# EAGLE board TMP (EAGLE 7.4.0)
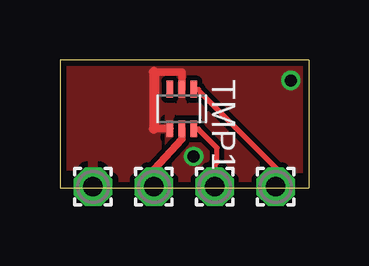
[diagram p0: board, top side]
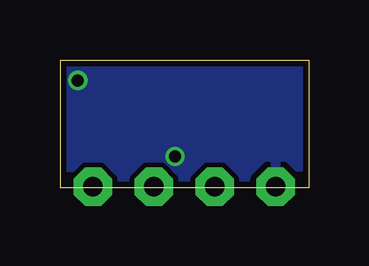
[diagram p1: board, bottom side, seen from below]

Size 10.38 x 5.35 mm. Coordinates in mm from the lower left corner, seen from the top.
Outline: 0,0 10.38,0 10.38,5.35 0,5.35 0,0
Copper layers (1*16): Top 0.035mm / dielectric 1.5mm / Bottom 0.035mm
Design rules "PMServicesStd *": minimum track width 8mil, minimum drill 0.5mm, track to track 8mil, track to pad 8mil, pad to pad 8mil, via to via 8mil, smd to smd 0mil, copper to edge 10mil, drill to drill 10mil, minimum pad ring 10mil, minimum via ring 6mil, stop-mask expansion 2mil, vias tented up to drill 100mil, thermal gap 10mil
Net classes: 0 default: width 0.203 mm; 1 supply: width 0.406 mm, clearance 0.203 mm; 2 ant: width 2.184 mm

## Footprints (pad centres in the part's own frame; a part is rotated, then mirrored left to right if it is on the bottom)
1,6/0,8 = drill 0.813 pad 1.6 octagon: 1 0,0
TMP112 = smd 0.285 x 0.7: 1 -0.5,-0.825; 2 0,-0.825; 3 0.5,-0.825; 4 0.5,0.825; 5 0,0.825; 6 -0.5,0.825

## Placement (x,y rotation side)
PAD1  [1,6/0,8]  9,0.05 0 top
PAD2  [1,6/0,8]  1.38,0.05 0 top
PAD3  [1,6/0,8]  3.92,0.05 0 top
PAD4  [1,6/0,8]  6.46,0.05 0 top
TMP1  TMP1  [TMP112]  5.08,3.3 180 top

## Library data of the parts
PAD1-PAD4 = wirepad
TMP1 = TMP112

## Nets
GND [supply]: PAD2.1 TMP1.2 TMP1.4
SCL: PAD1.1 TMP1.1
SDA: PAD4.1 TMP1.6
VCC [supply]: PAD3.1 TMP1.5

## Tracks (layer width: path | path; a pad name or v marks a point on that pad's centre or on a via)
GND  (via drill 0.5)
  Top 0.305: TMP1.4 3.92,2.48 | TMP1.2 5.08,4.85 3.92,4.85
  Top 0.406: 3.92,4.85 3.92,2.48
  other vias: 5.58,1.32 9.64,4.5
  pour Top: 0,0.05 10.38,0.05 10.38,5.35 0,5.35
  pour Bottom: 0,0.05 10.38,0.05 10.38,5.35 0,5.35
SCL
  Top 0.203: TMP1.1 5.79,4.13 5.85,4.01 9.1,0.76 PAD1.1
  Top 0.305: PAD1.1 9,0.69
SDA
  Top 0.203: TMP1.6 5.79,2.48 5.85,2.39 6.56,1.68 6.56,1.07 6.46,0.96 PAD4.1
  Top 0.305: PAD4.1 6.46,0.69
VCC
  Top 0.305: TMP1.5 5.08,2.05 3.92,0.78 3.92,0.69 PAD3.1